# Altium PCB joystickClocks.PcbDoc
Units mm, origin at the board's own origin, x right, y up, seen from the top; angles counter-clockwise.
Board outline 50 x 50 mm, 2 copper layers (Top Layer, Bottom Layer); 13 components, 11 nets, 45 pads, 8 vias.
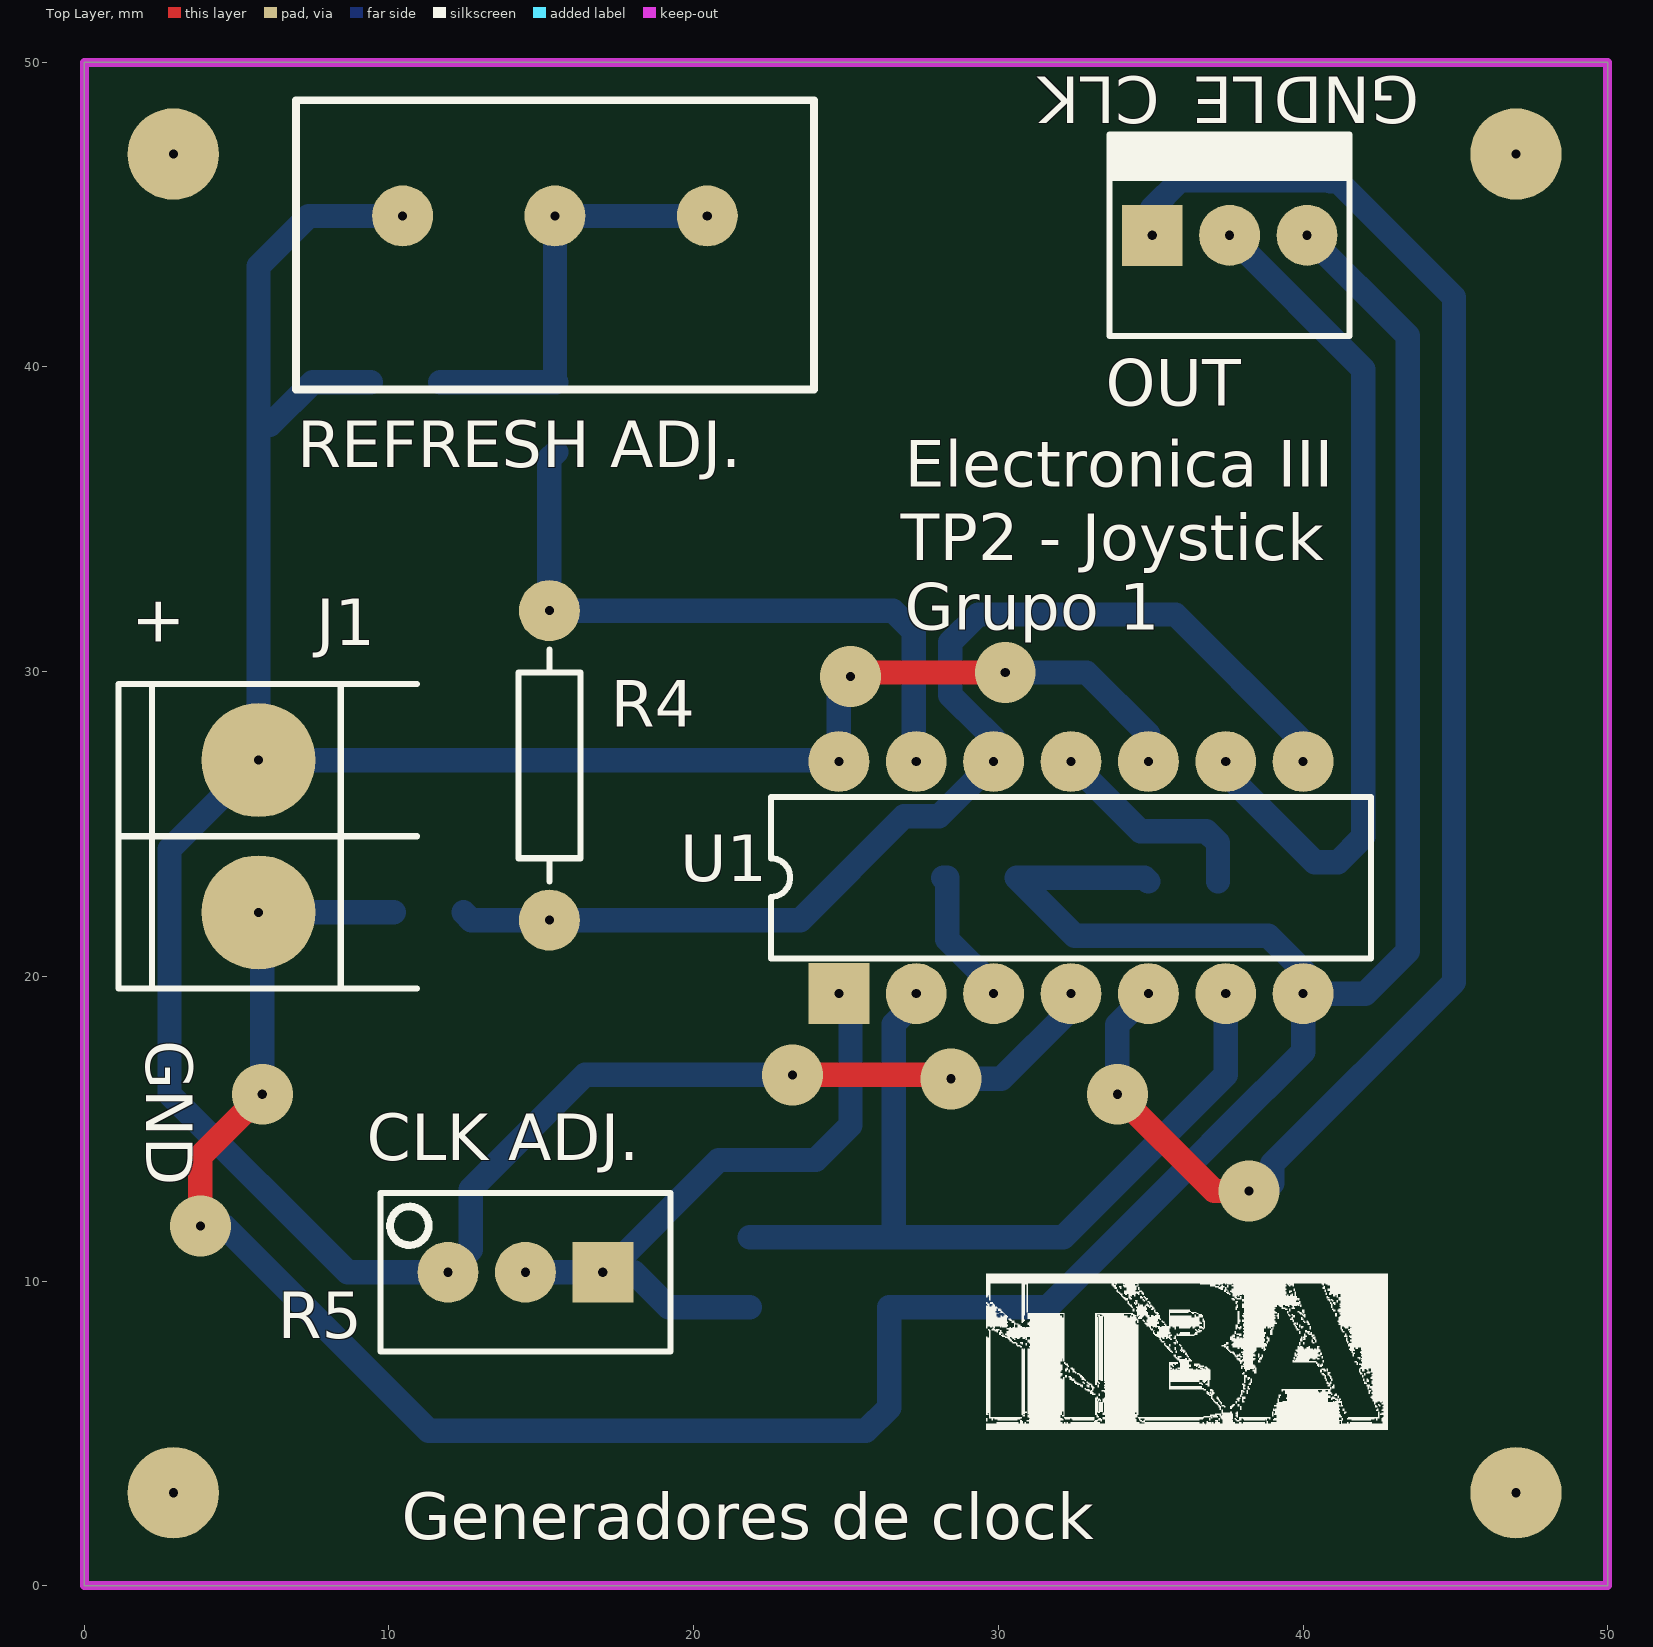
[diagram p0: Top Layer view]
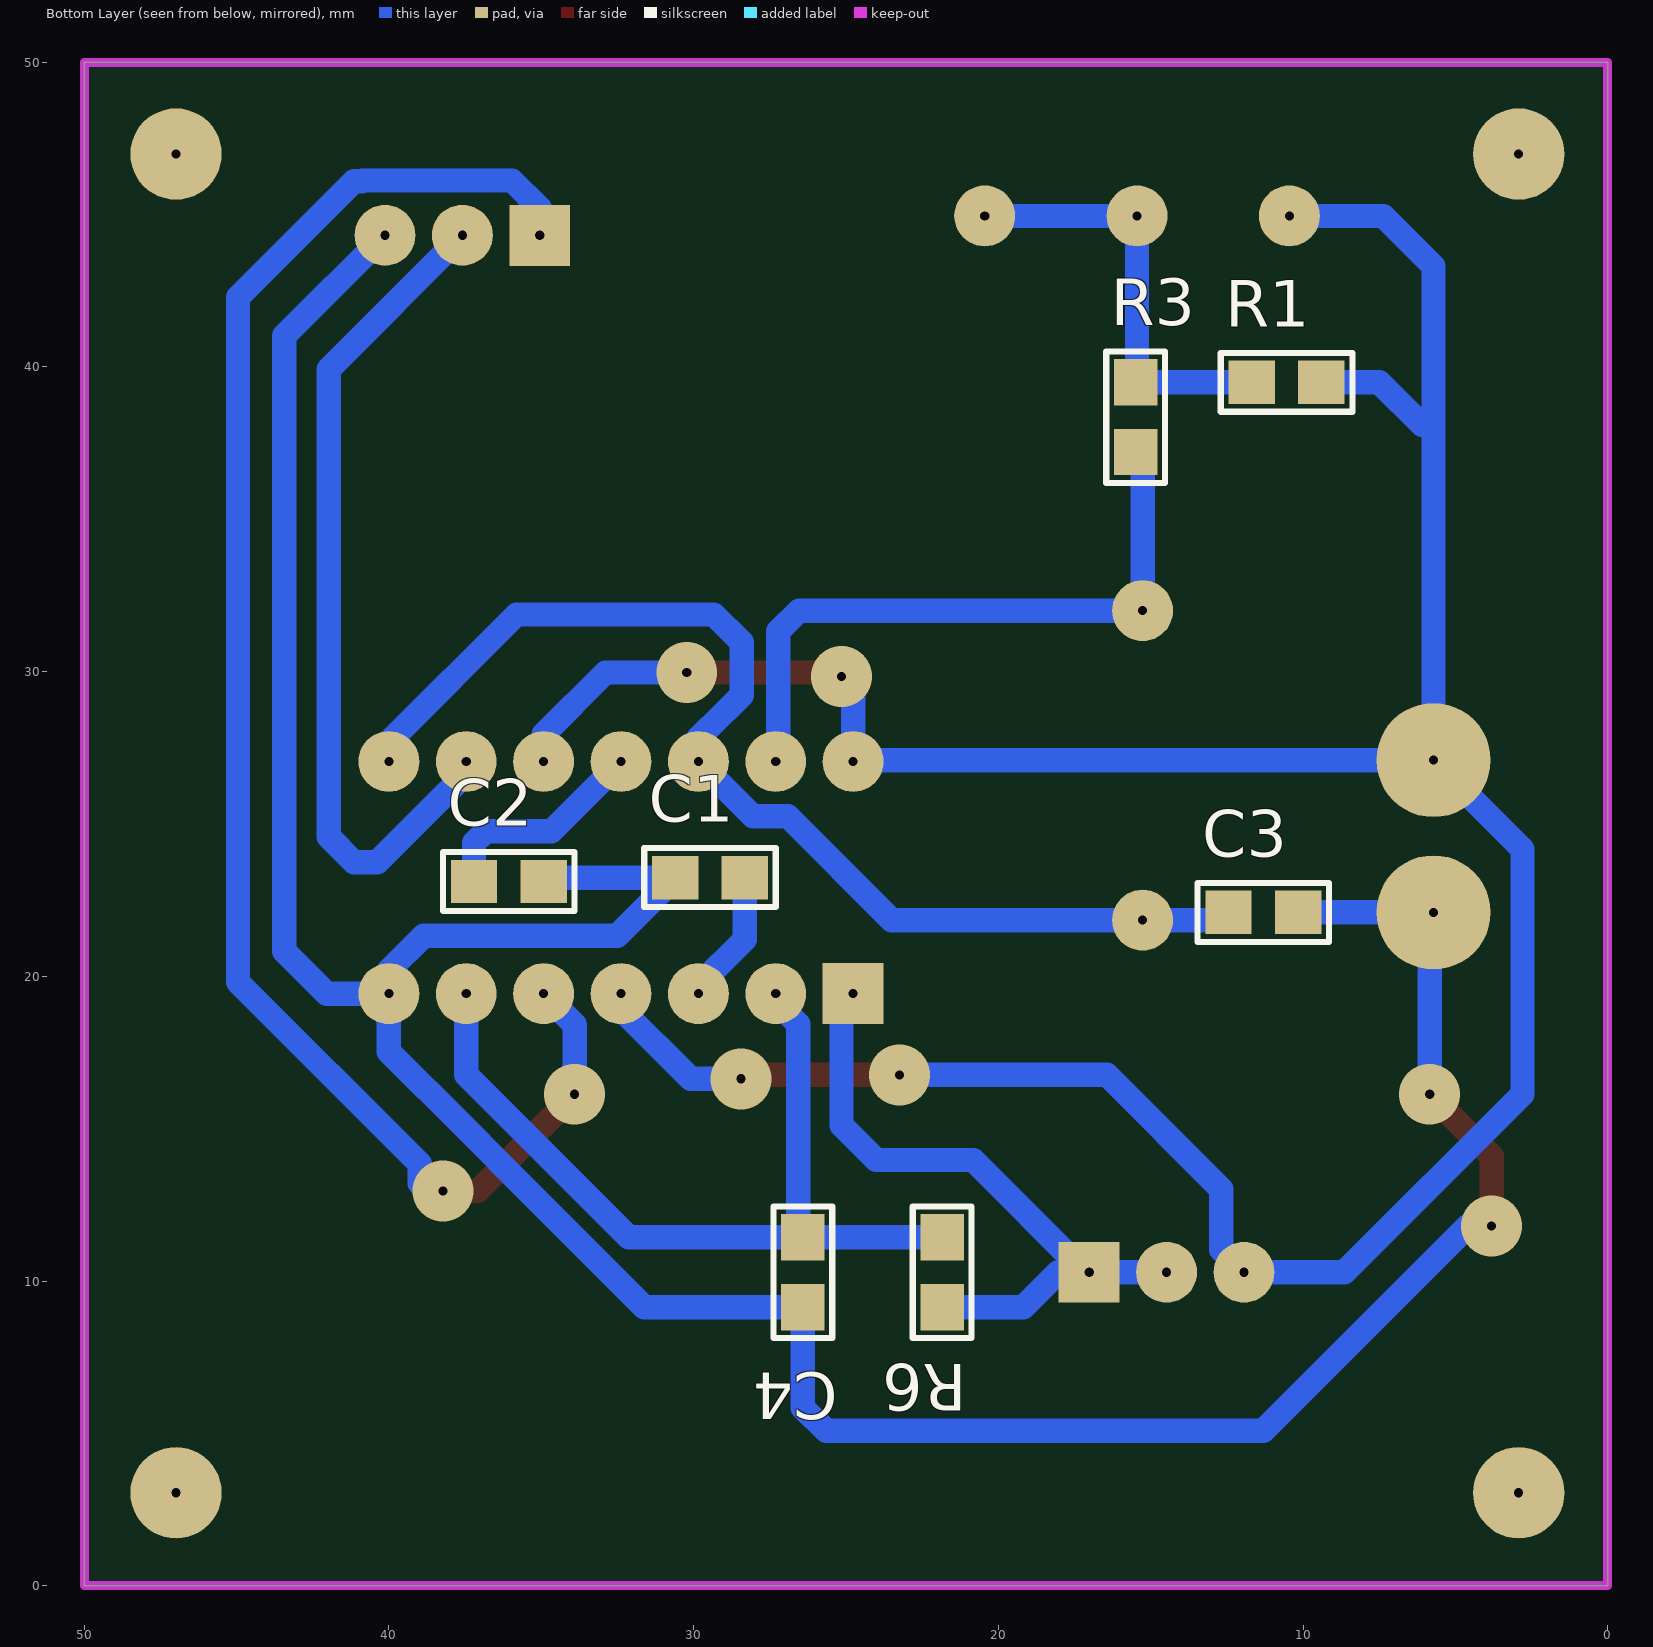
[diagram p1: Bottom Layer view, seen from below]
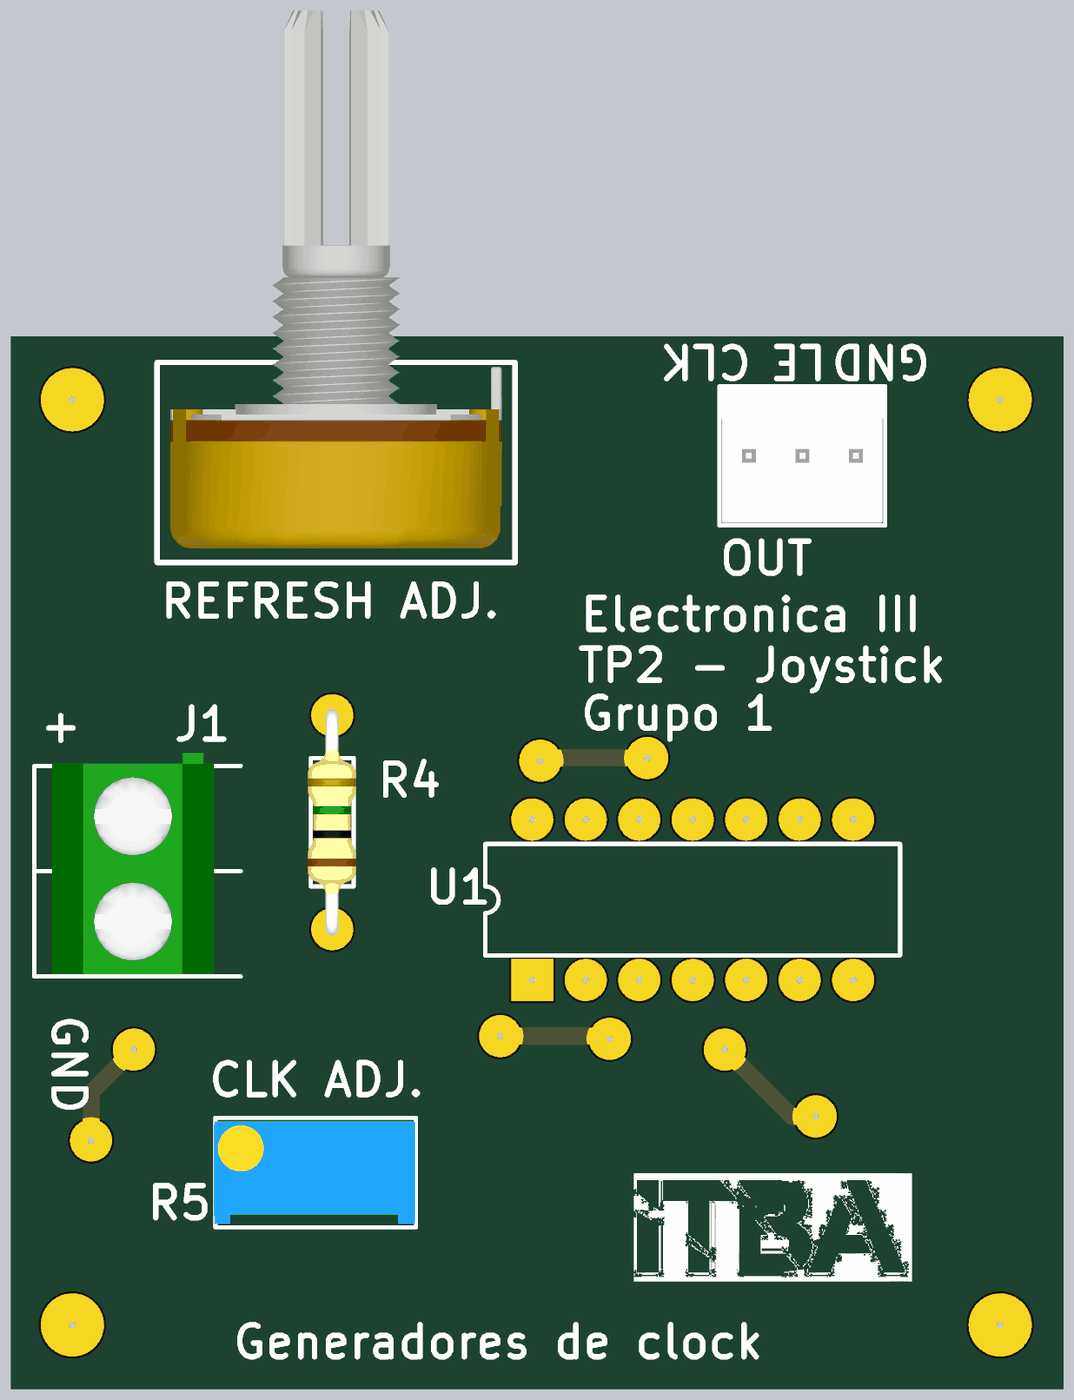
[diagram p2: 3D render of the assembled board from above, using the file's embedded part models]
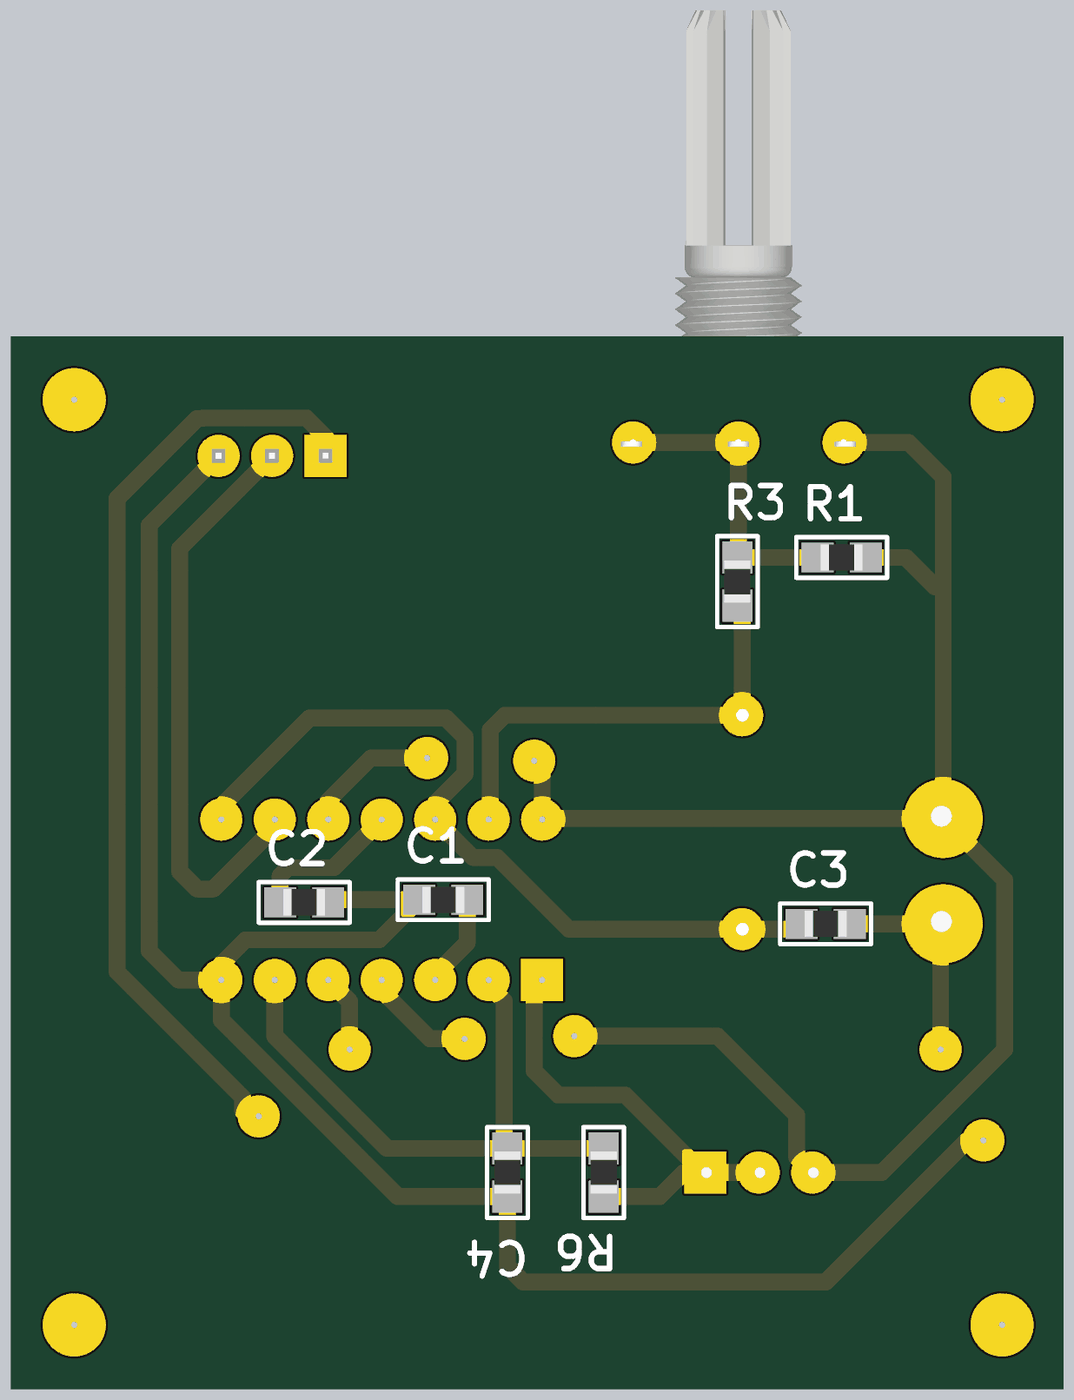
[diagram p3: 3D render of the assembled board from below, using the file's embedded part models]

## Layer stack, top to bottom
Top Solder: solder mask 0.0102, Solder Resist, Dk 3.5
Top Layer: signal copper 0.0356
Dielectric 1: dielectric 0.32, FR-4, Dk 4.8
Bottom Layer: signal copper 0.0356
Bottom Solder: solder mask 0.0102, Solder Resist, Dk 3.5

## Board outline
0,0 50,0 50,50 0,50

## Design rules (kind name [scope] priority, off if disabled: settings)
Clearance [All] p1: gap=0.4 ignorepadtopadclearanceinfootprint=FALSE
PolygonConnect [All] p1: connectstyle=Relief reliefconductorwidth=0.254 reliefentries=4 polygonreliefangle="90 Angle" airgapwidth=0.254
RoutingVias [All] p1: holewidth=0.3 width=1.75 viastyle="Through Hole" minholewidth=0.3 minwidth=1.75 maxholewidth=0.3 maxwidth=1.75
SolderMaskExpansion [All] p1: expansion=0.102
Width [All] p1: maxlimit=0.9 minlimit=0.7 preferedwidth=0.8
30 further rules are at their usual default settings.

## Components (designator, comment, footprint, x,y, rotation, side; value= is the part's Value field where it differs from the comment)
C1 "CAP" 0805 29.464,23.241 r0 bottom
C2 "CAP" 0805 36.068,23.114 r180 bottom
C3 "4.7u" 0805 11.303,22.098 r180 bottom
C4 "180n" 0805 26.416,10.287 r270 bottom
J1 "BORNERA 2" BORNERA2 5.715,24.598 r0 top
OUT "MOLEX3" MOLEX3 35.052,44.323 r0 top (schematic designator J2)
R1 "680k" 0805 10.541,39.497 r180 bottom
R3 "15k" 0805 15.494,38.354 r90 bottom
R4 "180" RES400 15.265,21.844 r90 top
R5 "1k" "PRESET V" 14.478,10.287 r180 top
R6 "100" 0805 21.844,10.287 r270 bottom
"REFRESH ADJ." "POT 500k" POTENCIOMETRO 15.447,44.958 r180 top (schematic designator R2)
U1 "NE556N" N014 32.385,23.241 r0 top

## Footprints (in the part's own frame and the unit in brackets; to place one, negate y for a bottom-side part, rotate by r counter-clockwise, add the part's x,y. Pads: shape width x height; smd on the part's side, far side on the other; paste and mask are expansions set on the pad)
0805 [mil] "Pasivo 0805"
  rect 60x56 smd: 1(-45,0) 2(45,0)
  silkscreen extent -85,-38 85,38, body extent -39,-24 39,25, height 15
BORNERA2 [mm] "Bornera con Tornillos 5mm separación"
  round 3.75 hole 0.3: 1(0,2.5) 2(0,-2.5)
  silkscreen extent -4.6,-5 5.2,5, body extent -3.76,-4.89 3.94,5.61, height 10
MOLEX3 [mm]
  rect 2x2 hole 0.3: 1(0,0)
  round 2 hole 0.3: 2(2.54,0) 3(5.08,0)
  silkscreen extent -1.4,-3.3 6.48,3.3, body extent -1.27,-3.17 6.35,3.17, height 10.74
N014 [mm] "DIP; 14 Leads; Row Spacing 7.62 mm; Pitch 2.54 mm"
  rect 2x2 hole 0.3: 1(-7.62,-3.81)
  round 2 hole 0.3: 2(-5.08,-3.81) 3(-2.54,-3.81) 4(0,-3.81) 5(2.54,-3.81) 6(5.08,-3.81) 7(7.62,-3.81) 8(7.62,3.81) 9(5.08,3.81) 10(2.54,3.81) 11(0,3.81) 12(-2.54,3.81) 13(-5.08,3.81) 14(-7.62,3.81)
  silkscreen extent -9.85,-2.65 9.85,2.65
POTENCIOMETRO [mm]
  round 2 hole 0.3: 1(-5,0) 2(0,0) 3(5,0)
  silkscreen extent -8.5,-3.8 8.5,5.7, body extent -7.87,-20.53 7.87,5.03, height 20.12
"PRESET V" [mm]
  rect 2x2 hole 0.3: 1(-2.54,0)
  round 2 hole 0.3: 2(0,0) 3(2.54,0)
  silkscreen extent -4.76,-2.6 4.76,2.6, body extent -4.7,-2.42 4.83,2.42, height 11.55
RES400 [mm]
  round 2 hole 0.3: 1(0,0) 2(10.16,0)
  silkscreen extent 1.27,-1.02 8.89,1.02, body extent -0.3,-1.14 10.46,1.17, height 2.43

## Part data
C3 C4: library part CAP
R1 R3 R4 R6: library part RES
R5: library part PRESET
"REFRESH ADJ.": library part POTENCIOMETRO
U1: "Dual Precision Timer", ComponentLink1Description="Manufacturer Link", ComponentLink1URL=http://www.ti.com/, ComponentLink2Description=Datasheet, ComponentLink2URL=http://www-s.ti.com/sc/ds/ne556.pdf, DatasheetVersion=Dec-1999, LatestRevisionDate=04-Mar-2005, LatestRevisionNote="Stylized 3D Model Added.", PackageDescription="DIP; 14 Leads; Row Spacing 7.62 mm; Pitch 2.54 mm", PackageReference=N014, PackageVersion=Oct-1995, Published=16-Jan-2001, Publisher="Altium Limited"

## Free pads (board coordinates)
  round 3 hole 0.3: 2(2.921,3.048) 2(2.921,46.99) 2(46.99,3.048) 2(46.99,46.99)

## Via types
v1: diameter 2, hole 0.3, Top Layer to Bottom Layer, 8 vias

## Nets (pads, with @x,y where several pads share a name; then routed paths per layer and width w, separated by ;. In a path a pad name is that pad's centre, name@x,y a point inside that pad or via, vN(x,y) a via of type N, cw(c..) or ccw(c..) an arc to the next point about the centre after c; other vN are vias at no path point)
555_CLK: OUT.1 U1.5 | length 54.5
  Top Layer w0.8: v1(33.909,16.129) 37.084,12.954 v1(38.227,12.954)
  Bottom Layer w0.8: v1(33.909,16.129) 33.909,18.409 34.925,19.425 U1.5 ; OUT.1 35.052,45.212 35.963,46.123 40.878,46.123 40.9,46.101 41.148,46.101 44.958,42.291 44.958,19.812 38.989,13.843 38.989,13.208 38.735,12.954 v1(38.227,12.954)
DISCH_CLK: R5.1 R5.2 R6.2 U1.1 | length 22.3
  Bottom Layer w0.8: R5.2 R5.1 R5.1@17.145,10.287 ; R6.2 19.177,9.144 18.034,10.287 R5.1@17.145,10.287 ; U1.1 25.146,19.05 25.146,15.113 24.003,13.97 20.828,13.97 R5.1@17.145,10.287
DISCH_REF: R3.1 R4.2 U1.13 | length 21.8
  Bottom Layer w0.8: R3.1 15.265,36.982 R4.2 26.543,32.004 27.226,31.321 27.226,27.13 U1.13
GND: C1.2 C2.2 C3.2 C4.2 J1.2 OUT.3 U1.7 | length 108.3
  Top Layer w0.8: v1(3.81,11.811) 3.81,14.097 v1(5.842,16.129)
  Bottom Layer w0.8: v1(3.81,11.811) 4.572,11.811 11.303,5.08 25.654,5.08 26.416,5.842 C4.2 31.623,9.144 36.427,13.948 36.427,13.954 37.481,15.008 37.487,15.008 40.005,17.526 U1.7 ; v1(5.842,16.129) 5.842,21.971 J1.2 C3.2 ; C2.2 34.798,23.241 C1.2 32.512,21.336 38.862,21.336 40.005,20.193 U1.7 ; OUT.3 43.434,41.021 43.434,20.828 42.037,19.431 U1.7
LE: OUT.2 U1.9 | length 28.2
  Bottom Layer w0.8: U1.9 37.465,26.67 40.386,23.749 41.148,23.749 41.98,24.581 41.98,39.929 37.592,44.317 OUT.2 OUT.2@37.465,44.196
NetC1_1: C1.1 U1.3 | length 4.6
  Bottom Layer w0.8: C1.1@28.194,23.241 C1.1 28.321,21.209 29.845,19.685 U1.3
NetC2_1: C2.1 U1.11 | length 7.2
  Bottom Layer w0.8: U1.11 32.385,27.045 34.665,24.765 36.83,24.765 37.211,24.384 C2.1
NetR1_1: "REFRESH ADJ..1" "REFRESH ADJ..2" R1.1 R3.2 | length 14.3
  Bottom Layer w0.8: R1.1 R3.2 15.447,39.544 15.447,44.958 20.447,44.958
TRIG_CLK: C4.1 R6.1 U1.2 U1.6 | length 28.9
  Bottom Layer w0.8: R6.1 C4.1 ; U1.2 27.305,19.177 26.565,18.437 26.565,11.579 C4.1 ; U1.6 37.465,16.764 32.131,11.43 C4.1
TRIG_REF: C3.1 R4.1 U1.8 U1.12 | length 38.5
  Bottom Layer w0.8: C3.1 12.7,21.844 R4.1 23.495,21.844 26.902,25.251 28.051,25.251 29.845,27.045 U1.12 29.845,27.813 29.486,28.172 29.48,28.172 28.426,29.226 28.426,30.966 29.337,31.877 35.814,31.877 40.005,27.686 U1.8
vcc: "REFRESH ADJ..3" J1.1 R1.2 R5.3 U1.4 U1.10 U1.14 | length 109
  Top Layer w0.8: v1(23.241,16.764) 28.321,16.764 v1(28.448,16.637) ; v1(25.146,29.845) 25.273,29.972 v1(30.226,29.972)
  Bottom Layer w0.8: R1.2 7.493,39.497 6.096,38.1 5.715,38.1 ; 10.447,44.958 7.366,44.958 5.715,43.307 5.715,38.1 ; v1(23.241,16.764) 16.435,16.764 12.678,13.007 12.678,11.027 R5.3 8.642,10.287 2.794,16.135 2.794,24.177 J1.1 ; v1(25.146,29.845) 24.765,29.464 U1.14 24.718,27.098 J1.1 ; v1(28.448,16.637) 30.099,16.637 32.385,18.923 U1.4 ; v1(30.226,29.972) 32.893,29.972 34.925,27.94 U1.10 ; J1.1 5.715,38.1

## Keep-outs
Keep-Out Layer:
  the board outline again, w0.3

## Silkscreen, mask and mechanical layers (free items; w line width, h text height)
Top Overlay:
  drawing of 174 lines, arcs and shapes, not listed
  text "CLK" at 35.306,49.53 h1.52 r180
  text "LE" at 38.862,49.53 h1.52 r180
  text "GND" at 43.815,49.53 h1.52 r180
  text "Electronica III" at 26.924,36.068 h1.52
  text "TP2 - Joystick" at 26.797,33.655 h1.52
  text "+" at 1.778,32.512 h1.52 r270
  text "Grupo 1" at 26.924,31.369 h1.52
  text "GND" at 2.032,17.907 h1.52 r270
  text "CLK ADJ." at 9.271,13.97 h1.52
  text "Generadores de clock" at 10.414,1.524 h1.52